# Altium PCB Drozga_v1.2.PcbDoc
Units mm, origin at the board's own origin, x right, y up, seen from the top; angles counter-clockwise.
Board outline 152.4 x 101.6 mm, 2 copper layers (Top Layer, Bottom Layer); 49 components, 36 nets, 183 pads, 19 vias.
Unrouted connection lines stored in the file: 1.
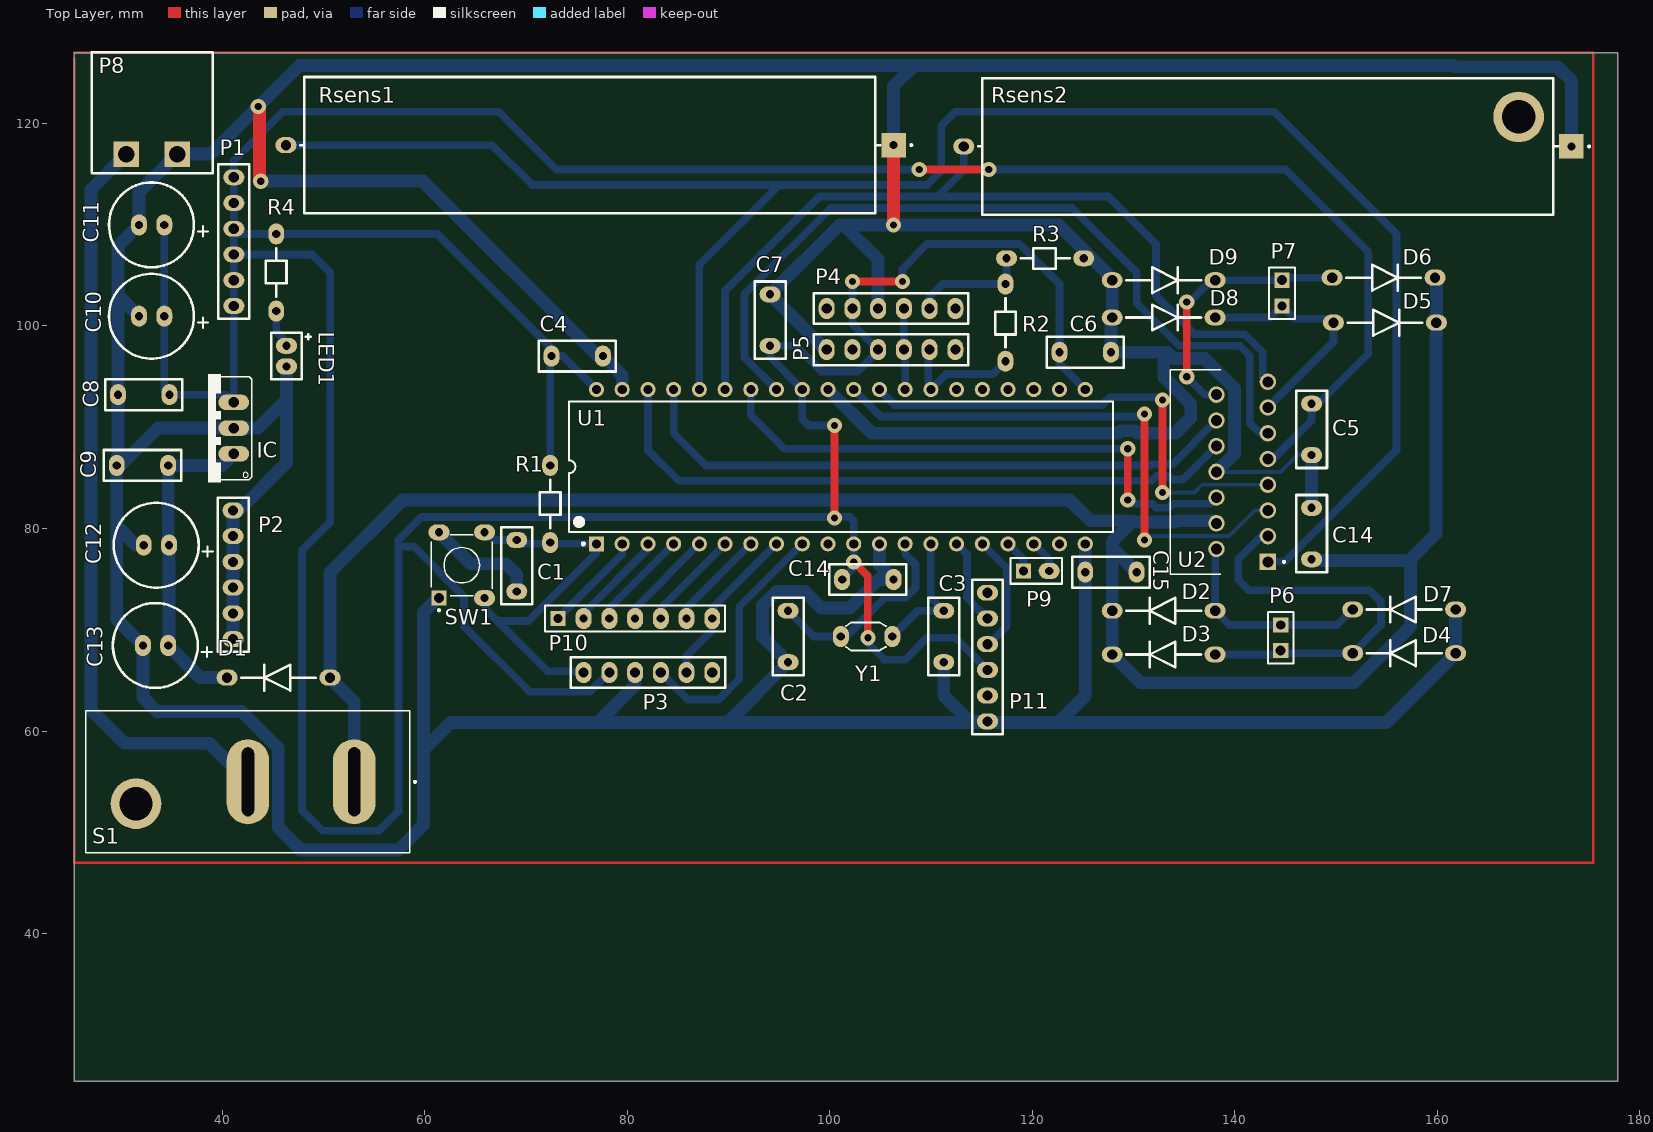
[diagram p0: Top Layer view]
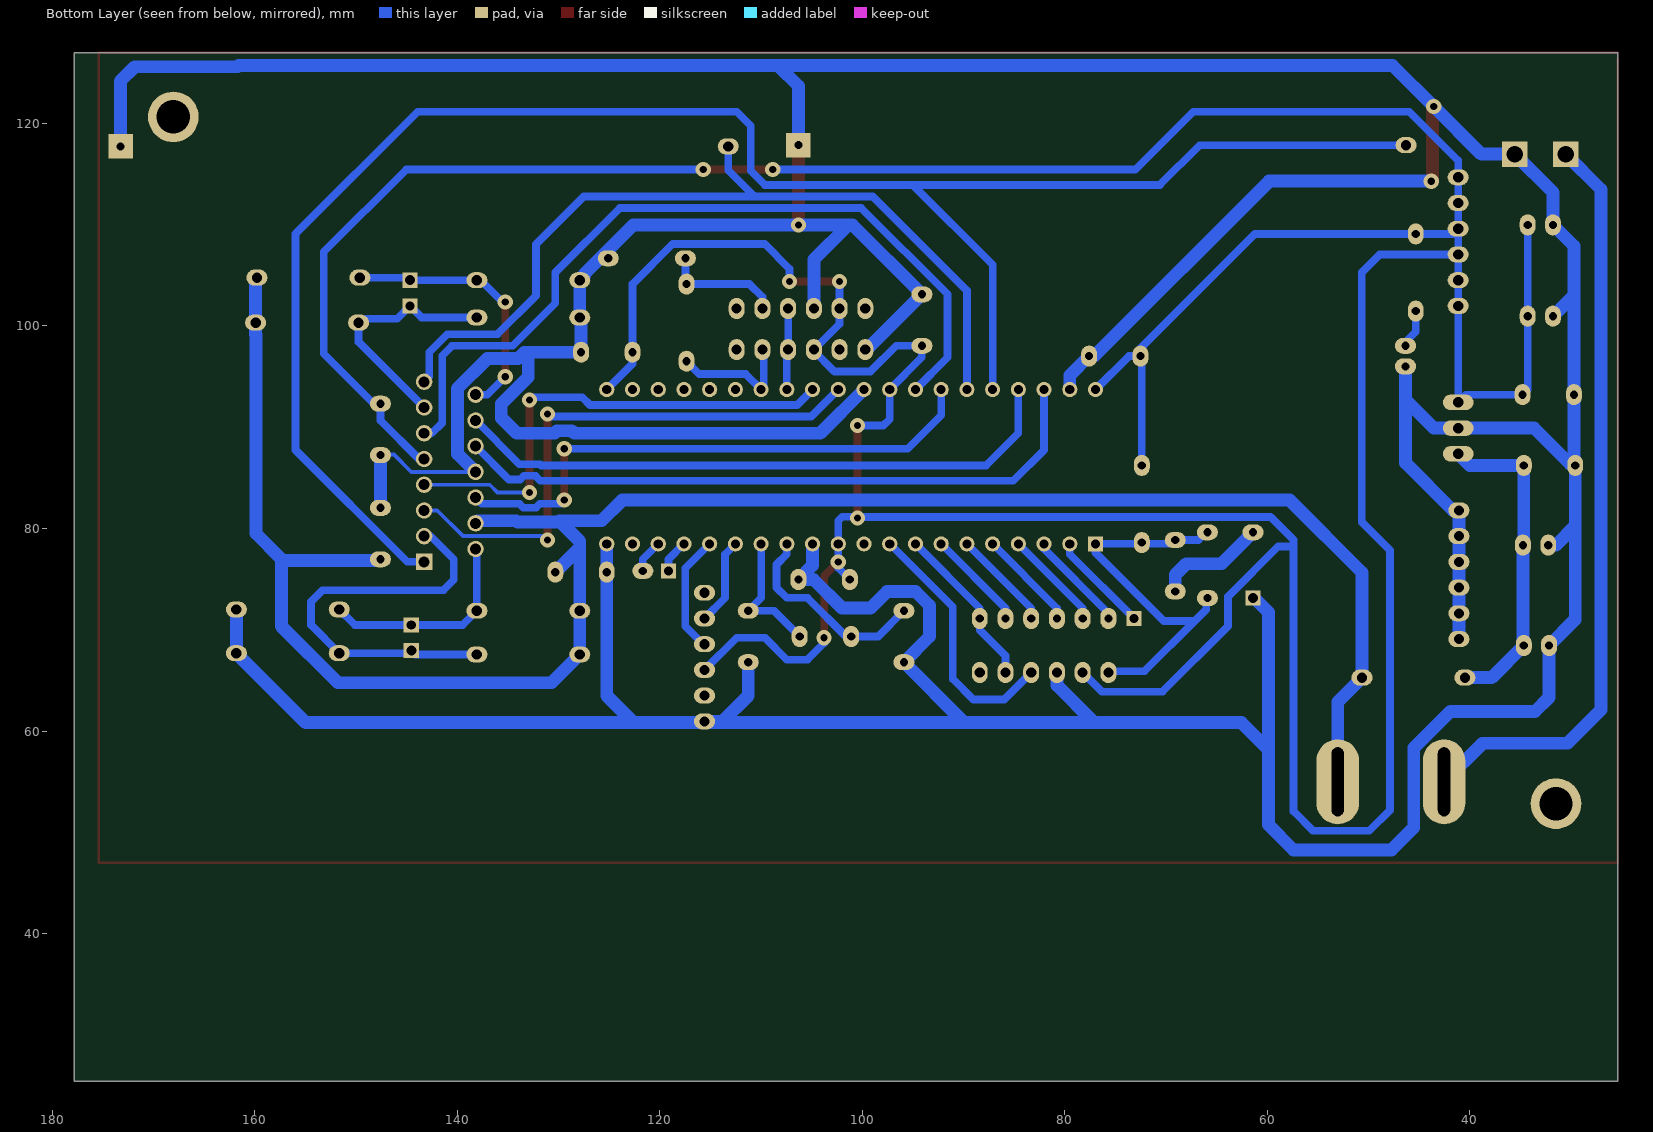
[diagram p1: Bottom Layer view, seen from below]

## Layer stack, top to bottom
Top Solder: solder mask 0.0102, Solder Resist, Dk 3.5
Top Layer: signal copper 0.0356
Dielectric 1: dielectric 0.32, FR-4, Dk 4.8
Bottom Layer: signal copper 0.0356
Bottom Solder: solder mask 0.0102, Solder Resist, Dk 3.5

## Board outline
25.4,25.4 177.8,25.4 177.8,127 25.4,127

## Design rules (kind name [scope] priority, off if disabled: settings)
Clearance [All] p1: gap=0.254 ignorepadtopadclearanceinfootprint=FALSE
PolygonConnect [All] p1: connectstyle=Relief reliefconductorwidth=0.254 reliefentries=4 polygonreliefangle="90 Angle" airgapwidth=0.254
RoutingVias [All] p1: holewidth=0.711 width=1.27 viastyle="Through Hole" minholewidth=0.711 minwidth=1.27 maxholewidth=0.711 maxwidth=1.27
SolderMaskExpansion [All] p1: expansion=0.102
Width Width_1 [InNetClass('Signal')] p1: maxlimit=0.762 minlimit=0.381 preferedwidth=0.762
Width [InNetClass('Power')] p2: maxlimit=1.27 minlimit=0.381 preferedwidth=1.27
30 further rules are at their usual default settings.

## Classes and differential pairs
net class Signal: +5 INT0 INT2 MCLR NetLED1_1 NetP4_5 OSC1 OSC2 OUT1 OUT2 OUT3 OUT4 PGC PGD PWM1 PWM2 RB0 RB1 RB2 RB3 RB4 RB5 RB9 RB10 RB11 RB12 RF0 RF1 U1ARX U1ATX U2RX U2TX
net class Power: GND NetC9_2 NetP8_2 VCC
component class Tenk: C1 C2 C3 C4 C5 C6 C7 C8 C9 C10 C11 C12 C13 C14 C15 D1 D2 D3 D4 D6 D7 D8 D9 IC LED1 P1 P2 P3 P4 P6 P7 P8 P9 P10 P11 R1 R2 R3 R4 Rsens1 Rsens2 S1 SW1 U1 U2 Y1

## Components (designator, comment, footprint, x,y, rotation, side; value= is the part's Value field where it differs from the comment)
C1 "Cap" CAP200#1 69.088,73.787 r90 top value=100nF
C2 "Cap" CAP200#1 95.885,66.802 r90 top value=33pF
C3 "Cap" CAP200#1 111.252,66.802 r90 top value=33pF
C4 "Cap" CAP200#1 77.597,97.028 r180 top value=100nF
C5 "Cap" CAP200#1 147.574,87.249 r90 top value=100nF
C6 "Cap" CAP200#1 127.762,97.409 r180 top value=100nF
C7 "Cap" CAP200#1 94.107,103.124 r270 top value=100nF
C8 "Cap" CAP200#1 29.718,93.218 r0 top value=100nF
C9 "Cap" CAP200#1 29.591,86.233 r0 top value=100nF
C10 "Cap Pol1" RAD4 34.29,100.965 r180 top value=470uF
C11 "Cap Pol1" RAD4 34.29,109.982 r180 top value=470uF
C12 "Cap Pol1" RAD4 34.758,78.359 r180 top value=470uF
C13 "Cap Pol1" RAD4 34.671,68.453 r180 top value=470uF
C14 "Cap" CAP200#1 106.299,74.969 r180 top value=100nF
C14 "Cap" CAP200#2 147.574,76.962 r90 top value=100nF (schematic designator C15)
C15 "Cap" CAP200#1 125.222,75.692 r0 top value=100nF
D1 "Diode 1N4007" DIODE400 45.82,65.278 r0 top
D2 "Diode 1N5402" DIODE400 133.223,71.882 r0 top
D3 "Diode 1N5402" DIODE400 133.223,67.564 r0 top
D4 "Diode 1N5402" DIODE400 156.972,67.691 r0 top
D5 "Diode 1N5402" DIODE400 154.559,100.33 r180 top
D6 "Diode 1N5402" DIODE400 154.432,104.775 r180 top
D7 "Diode 1N5402" DIODE400 156.972,72.009 r0 top
D8 "Diode 1N5402" DIODE400 132.715,100.838 r180 top
D9 "Diode 1N5402" DIODE400 132.715,104.521 r180 top
IC "L7805" 78XXS 38.608,89.916 r90 top
LED1 "GREEN" LED_2 46.736,97.028 r270 top
P1 "5V" HEADER_6 41.148,108.331 r180 top
P2 "GND" HEADER_6 41.081,75.438 r180 top
P3 "Programator" HEADER_6 82.042,65.786 r90 top
P4 "Bluetooth" HEADER_6 106.045,101.727 r90 top
P5 "FT232" HEADER_6 106.045,97.663 r270 top
P6 "Motor 1" HDR1X2#1 144.526,70.485 r270 top
P7 "Motor 2" HDR1X2#1 144.653,101.981 r90 top
P8 "2EDGRC-5.08-02P-14-00A(H)" PWR_Con 32.639,121.031 r90 top
P9 "Interrupt" HDR1X2#2 119.126,75.819 r0 top
P10 "GPIO" HDR1X7 73.152,71.12 r0 top
P11 "FT232" HEADER_6 115.57,67.31 r0 top
R1 "Res1" RES400 72.39,82.423 r90 top value=10K
R2 "Res1" RES400 117.348,100.33 r270 top value=4.7K
R3 "Res1" RES400 121.265,106.68 r180 top value=10K
R4 "Res1" RES400 45.339,105.283 r90 top value=1K
Rsens1 "15W" Rsens 76.299,117.856 r180 top value=5
Rsens2 "15W" Rsens 143.228,117.729 r180 top value=5
S1 "" SW_RB141C1100 42.545,54.991 r0 top
SW1 "TASTER" SW_1825910-6-4 63.663,76.379 r90 top
U1 "DSPIC30F4013-20I/P" PDIP600-P40 101.092,86.106 r90 top
U2 "L298N" TO127P2020X500X2100-15 143.256,76.708 r180 top
Y1 "XTAL" OSC_5 103.251,69.342 r90 top

## Footprints (in the part's own frame and the unit in brackets; to place one, negate y for a bottom-side part, rotate by r counter-clockwise, add the part's x,y. Pads: shape width x height; smd on the part's side, far side on the other; paste and mask are expansions set on the pad)
78XXS [mil]
  oval 60x120 hole 40: GND(0,-100) IN(-100,-100) OUT(100,-100)
  silkscreen extent -210,-170 210,0
CAP200#1 [mil]
  oval 62x82 hole 32: 1(0,0) 2(200,0)
  silkscreen extent -50,-60 250,60
CAP200#2 [mil]
  oval 62x82 hole 32: 14.1(0,0) 14.2(200,0)
  silkscreen extent -50,-60 250,60
DIODE400 [mil]
  oval 82x62 hole 40: 1(190,0) 2(-210,0)
  silkscreen extent -155,-50 135,50
HDR1X2#1 [mm] "Connector; Header; 2 Position"
  rect 1.5x1.5 hole 0.9: 1(0,0)
  rect 1.498x1.498 hole 0.99: 2(2.54,0)
  silkscreen extent -1.27,-1.27 3.81,1.27
HDR1X2#2 [mm] "Connector; Header; 2 Position"
  rect 1.5x1.5 hole 0.9: 1(0,0)
  oval 2.083x1.575 hole 0.813: 2(2.54,0)
  silkscreen extent -1.27,-1.27 3.81,1.27
HDR1X7 [mil] "Connector; Header; 7 Position"
  rect 59.06x59.06 hole 35.43: 1(0,0)
  oval 62x82 hole 32: 2(100,0) 3(200,0) 4(300,0) 5(400,0) 6(500,0) 7(600,0)
  silkscreen extent -50,-50 650,50
HEADER_6 [mil]
  oval 82x62 hole 39.37: 1(0,250) 2(0,150) 3(0,50) 4(0,-50) 5(0,-150) 6(0,-250)
  silkscreen extent -60,-300 60,300
LED_2 [mil]
  oval 62x82 hole 32: 1(40,-15) 2(-40,-15)
  silkscreen extent -90,-75 90,80, body extent -105,-126 110,106, height 346
OSC_5 [mil]
  oval 82x62 hole 32: 1(0,-115) 2(0,85)
  silkscreen extent -55,-90 55,65, body extent -92,-240 92,207, height 138
PDIP600-P40 [mm] "DIP, 40-Leads, Row Spacing 15.24mm, Pitch 2.54mm, Body 51.8x13.5mm"
  rect 1.5x1.5 hole 0.9: 1(-7.62,24.13)
  round 1.5 hole 0.9: 2(-7.62,21.59) 3(-7.62,19.05) 4(-7.62,16.51) 5(-7.62,13.97) 6(-7.62,11.43) 7(-7.62,8.89) 8(-7.62,6.35) 9(-7.62,3.81) 10(-7.62,1.27) 11(-7.62,-1.27) 12(-7.62,-3.81) 13(-7.62,-6.35) 14(-7.62,-8.89) 15(-7.62,-11.43) 16(-7.62,-13.97) 17(-7.62,-16.51) 18(-7.62,-19.05) 19(-7.62,-21.59) 20(-7.62,-24.13) 21(7.62,-24.13) 22(7.62,-21.59) 23(7.62,-19.05) 24(7.62,-16.51) 25(7.62,-13.97) 26(7.62,-11.43) 27(7.62,-8.89) 28(7.62,-6.35) 29(7.62,-3.81) 30(7.62,-1.27) 31(7.62,1.27) 32(7.62,3.81) 33(7.62,6.35) 34(7.62,8.89) 35(7.62,11.43) 36(7.62,13.97) 37(7.62,16.51) 38(7.62,19.05) 39(7.62,21.59) 40(7.62,24.13)
  silkscreen extent -7.74,-26.85 6.45,26.85, body extent -7.3,-26.85 7.3,26.85, height 6.35
PWR_Con [mil]
  rect 100x100 hole 62.99: 1(-160,-115) 2(-160,83)
  silkscreen extent -234,-253 236,217, body extent -239,-256 234,222, height 344
RAD4 [mil]
  oval 62x82 hole 32: 1(0,0) 2(98.43,0)
  silkscreen extent -170,-165 215,165
RES400 [mil]
  oval 82x62 hole 32: 1(-150,0) 2(150,0)
  silkscreen extent -95,-40 95,40
Rsens [mm]
  oval 2.083x1.575 hole 1.016: A(30,0)
  rect 2.43x2.43 / inner round 2.43 / far side rect 2.43x2.43 hole 0.8: C(-30,0)
  silkscreen extent -31.85,-6.73 28.57,6.73
SW_1825910-6-4 [mm]
  rect 1.498x1.498 hole 0.99: 1(-3.25,2.25)
  oval 1.575x2.083 hole 0.813: 2(3.25,2.25) 3(-3.25,-2.25) 4(3.25,-2.25)
  silkscreen extent -4.54,-3 3,3
SW_RB141C1100 [mm]
  oval 4.2x8.4 hole 1.2 slot 6.8 at 90 deg: 1(10.5,0) 2(0,0)
  silkscreen extent -16,-7 16.6,7, body extent -16.35,-7 16.35,7, height 24.57
TO127P2020X500X2100-15 [mm]
  rect 1.62x1.62 hole 1.08: 1(0,0)
  round 1.62 hole 1.08: 2(5.08,-1.27) 3(0,-2.54) 4(5.08,-3.81) 5(0,-5.08) 6(5.08,-6.35) 7(0,-7.62) 8(5.08,-8.89) 9(0,-10.16) 10(5.08,-11.43) 11(0,-12.7) 12(5.08,-13.97) 13(0,-15.24) 14(5.08,-16.51) 15(0,-17.78)
  silkscreen extent -1.69,-18.99 9.63,1.21

## Part data
C1 C2 C3 C4 C5 C6 C7 C8 C9 C14 C14 C15: "Capacitor", LatestRevisionDate=17-Jul-2002, LatestRevisionNote="Re-released for DXP Platform.", PackageDescription="Radial Cap, Thru-Hole; 2 Leads; 0.3 in Pin Spacing", PackageReference=RAD-0.3, Published=8-Jun-2000, Publisher="Altium Limited"
C10 C11 C12 C13: "Polarized Capacitor (Radial)", LatestRevisionDate=17-Jul-2002, LatestRevisionNote="Re-released for DXP Platform.", PackageDescription="Polarized Capacitor (Radial); 2 Leads", PackageReference=RB7.6-15, Published=8-Jun-2000, Publisher="Altium Limited"
D1: "1 Amp General Purpose Rectifier", Code_JEDEC=DO-204-AL, ComponentLink1Description="Manufacturer Link", ComponentLink1URL=http://www.fairchildsemi.com/, ComponentLink2Description=Datasheet, ComponentLink2URL=http://www.fairchildsemi.com/ds/1N%2F1N4001.pdf, DatasheetVersion=1998, LatestRevisionDate=17-Jul-2002, LatestRevisionNote="Re-released for DXP Platform.", PackageDescription="Diode, Axial; Body 5.2 x 2.7 mm (LxDia. max), Lead Dia. 0.86 mm (max)", PackageReference=DO-41, PackageVersion=Aug-1999, Published=8-Jun-2000, Publisher="Altium Limited"
D2 D3 D4 D5 D6 D7 D8 D9: "3 Amp General Purpose Rectifier", ComponentLink1Description="Manufacturer Link", ComponentLink1URL=http://www.fairchildsemi.com/, ComponentLink2Description=Datasheet, ComponentLink2URL=http://www.fairchildsemi.com/ds/1N%2F1N5400.pdf, DatasheetVersion=1998, LatestRevisionDate=17-Jul-2002, LatestRevisionNote="Re-released for DXP Platform.", PackageDescription="Diode, Axial; Body 9.5 x 5.6 mm (LxDia. max), Lead Dia. 1.32 mm (max)", PackageReference=DO-201AD, PackageVersion=Aug-1999, Published=8-Jun-2000, Publisher="Altium Limited"
IC: "Linear Voltage Regulator IC 1 Output 1.5A D2PAK", Package="TO-263-3 Inchange Semiconductor", Availability=Unavailable, MF=STMicroelectronics, MP=L7805, Price=None, SnapEDA_Link=https://www.snapeda.com/parts/L7805/STMicroelectronics/view-part/563125/?ref=snap
LED1: library part LED1, "Typical RED GaAs LED", LatestRevisionDate=08-Jul-2005, LatestRevisionNote="Mech Layer 1 removed.", PackageDescription="LED; 2 Leads", PackageReference=LED-1, Published=8-Jun-2000, Publisher="Altium Limited"
P1 P2 P3 P4 P5 P11: library part "Header 6", "Header, 6-Pin", LatestRevisionDate=17-Jul-2002, LatestRevisionNote="Re-released for DXP Platform.", Publisher="Altium Limited"
P6 P7 P9: library part "Header 2", "Header, 2-Pin", LatestRevisionDate=17-Jul-2002, LatestRevisionNote="Re-released for DXP Platform.", Publisher="Altium Limited"
P8: library part 00000002, "TERM BLOCK HDR 2POS 90DEG 5.08MM", Manufacturer Part Number=2EDGRC-5.08-02P-14-00A(H), Price=0.1304, Suplier=TME, Suplier Product Link=https://www.tme.eu/en/details/2edgrc5.08-2p14/pluggable-terminal-blocks/degson-electronics/2edgrc-508-02p-14-00ah/
P10: library part "Header 7", "Header, 7-Pin", LatestRevisionDate=17-Jul-2002, LatestRevisionNote="Re-released for DXP Platform.", Publisher="Altium Limited"
R1 R2 R3 R4: "Resistor", LatestRevisionDate=17-Jul-2002, LatestRevisionNote="Re-released for DXP Platform.", PackageDescription="Axial Device, Thru-Hole; 2 Leads; 0.3 in Pin Spacing", PackageReference=AXIAL-0.3, Published=8-Jun-2000, Publisher="Altium Limited"
Rsens1 Rsens2: library part Res1, "Resistor", LatestRevisionDate=17-Jul-2002, LatestRevisionNote="Re-released for DXP Platform.", PackageDescription="Axial Device, Thru-Hole; 2 Leads;", Published=8-Jun-2000, Publisher="Altium Limited"
S1: library part RB141C1100, "Rocker Switches 15A 125VAC, OFF-ON, Black Rocker, No Markings", Package=None, Availability="In Stock", Check_prices=https://www.snapeda.com/parts/RB141C1100/ITC/view-part/?ref=eda, MF="e-switch inc", MP=RB141C1100, Price=None, Purchase-URL=https://pricing.snapeda.com/search/part/RB141C1100/?ref=eda, SnapEDA_Link=https://www.snapeda.com/parts/RB141C1100/ITC/view-part/?ref=snap
SW1: library part 1825910-6, "Switch Tactile OFF (ON) SPST Round Button PC Pins 0.05A 24VDC 100000Cycles 1.57N Thru-Hole Loose", Package=None, Availability=Unavailable, MP=1825910-6, Price=None
U1: "High-Performance 16-bit Digital Signal Controller, 48 KB Flash, 2 KB SRAM, 1 KB EEPROM, 40-Pin PDIP, Industrial Temperature", Supplier Part Number 1=DSPIC30F4013-20IP-ND, ComponentLink1Description=Datasheet, ComponentLink1URL=http://ww1.microchip.com/downloads/en/DeviceDoc/70138F.pdf, ComponentLink2Description="Packaging Specification", ComponentLink2URL=http://www.microchip.com/stellent/groups/techpub_sg/documents/packagingspec/en012702.pdf, ComponentLink3Description="Microchip.com Home", ComponentLink3URL=http://www.microchip.com/, DatasheetVersion="revF, Apr-2008", PackageDescription="40-Lead Plastic Dual In-Line (P) - 600 mil Body [PDIP]", PackageReference=PDIP600-P40, PackageVersion="revBB, Aug-2009", Published=29-Jan-2009, Publisher="Altium Limited", Supplier 1=Digi-Key, Supplier 2=Farnell, Supplier Part Number 2=1439755
U2: "Dual Full Bridge Motor Driver 15-Pin(15+Tab) MULTIWATT V Tube", Package=None, Availability=Unavailable, MP=L298N, Price=None
Y1: "Crystal Oscillator", LatestRevisionDate=17-Jul-2002, LatestRevisionNote="Re-released for DXP Platform.", PackageDescription="Crystal, Thru-Hole; 2 Leads; Body 3.1 x 8.2 mm (Dia.xH)", PackageReference=R38, Published=8-Jun-2000, Publisher="Altium Limited"

## Free pads (board coordinates)
  round 5 hole 3.3: MH(31.496,52.832) MH(168.021,120.65)

## Via types
v1: diameter 1.5, hole 0.711, Top Layer to Bottom Layer, tented both sides, 19 vias

## Nets (pads, with @x,y where several pads share a name; then routed paths per layer and width w, separated by ;. In a path a pad name is that pad's centre, name@x,y a point inside that pad or via, vN(x,y) a via of type N, cw(c..) or ccw(c..) an arc to the next point about the centre after c; other vN are vias at no path point)
+5: C4.2 C5.2 C6.2 C7.2 C8.2 C10.1 C11.1 C14.2 IC.OUT P1.1 P1.2 P1.3 P1.4 P1.5 P1.6 P3.2 P4.2 P5.4 P11.4 R1.2 R4.2 U1.11 U1.21 U1.32 U1.40 U2.9 | length 531.8
  Top Layer w0.762: v1(100.457,81.026) v1(100.457,90.17) ; v1(102.235,104.394) v1(107.188,104.394) ; v1(102.362,76.708) 103.759,75.311 v1(103.759,69.215) ; v1(108.839,115.443) v1(115.697,115.443)
  Bottom Layer w0.762: C11.1@34.671,109.601 C11.1 C10.1 34.29,93.726 C8.2 40.386,93.218 IC.OUT P1.1 P1.2 P1.3 ; R1.2 72.39,96.901 C4.2 ; U1.40 73.66,97.028 C4.2 ; P3.2 76.327,63.881 70.358,63.881 63.881,70.358 63.881,73.279 58.928,78.232 57.658,78.232 57.404,77.978 ; v1(100.457,90.17) 97.917,90.17 97.282,90.805 U1.32 94.107,96.901 C7.2 96.647,98.044 99.187,95.504 102.743,95.504 104.838,97.599 P5.4 102.235,100.203 P4.2 v1(102.235,104.394) ; C14.2 102.362,76.112 v1(102.362,76.708) U1.11 102.362,80.772 101.981,81.153 100.457,81.153 v1(100.457,81.026) 100.343,81.14 59.677,81.14 57.404,78.867 57.404,77.978 ; v1(103.759,69.215) 103.759,68.707 105.41,67.056 107.442,67.056 109.601,69.215 112.395,69.215 P11.4 ; v1(107.188,104.394) 107.188,105.664 109.627,108.103 118.719,108.103 122.682,104.14 C6.2 122.682,96.266 U1.21 ; v1(108.839,115.443) 73.025,115.443 67.31,121.158 45.974,121.158 41.148,116.332 P1.6 P1.5 P1.4 ; v1(115.697,115.443) 145.034,115.443 153.162,107.315 153.162,97.27 148.221,92.329 C5.2 147.574,90.678 143.764,86.868 U2.9 ; P1.3 48.895,107.061 50.673,105.283 50.673,80.645 47.879,77.851 47.879,52.197 49.92,50.156 55.49,50.156 57.404,52.07 57.404,77.978 ; P1.3 P1.4 ; P1.4 41.656,109.093 R4.2 61.214,109.093 72.517,97.79 C4.2
GND: C1.1 C2.1 C3.1 C4.1 C5.1 C6.1 C7.1 C8.1 C9.1 C10.2 C11.2 C12.2 C13.2 C14.1 C14.14.2 C15.1 D4.1 D7.1 D8.1 D9.1 IC.GND LED1.1 P2.1 P2.2 P2.3 P2.4 P2.5 P2.6 P3.3 P4.3 P5.6 P8.1 P11.6 R3.1 Rsens1.C Rsens2.C SW1.1 SW1.2 U1.12 U1.20 U1.31 U1.39 U2.8 | length 730.7
  Top Layer w1.27: v1(43.561,121.666) 43.687,121.54 43.687,114.428 v1(43.815,114.3) ; v1(106.299,109.982) Rsens1.C
  Bottom Layer w0.381: U2.8 144.526,85.598 146.24,87.312 147.511,87.312 C5.1
  Bottom Layer w1.27: C10.2 29.718,103.037 ; C12.2 31.496,78.359 29.591,80.264 ; P2.1 P2.2 P2.3 P2.4 P2.5 P2.6 41.656,81.788 46.355,86.487 46.355,92.71 ; v1(43.815,114.3) 59.817,114.3 77.089,97.028 C4.1 79.502,95.123 U1.39 ; LED1.1@46.736,96.012 46.355,95.631 46.355,92.71 ; SW1.1@61.413,73.256 59.889,71.732 59.889,58.166 ; SW1.2 64.524,76.517 68.008,76.517 69.088,75.438 C1.1 C1.1@69.342,73.787 ; P3.3 80.772,64.516 77.089,60.833 ; P5.6@99.568,97.663 C7.1 100.965,109.982 101.346,109.982 ; U1.31 104.14,89.408 128.439,89.408 128.682,89.65 130.144,89.65 130.387,89.408 134.112,89.408 135.636,90.932 135.636,92.297 132.969,94.964 132.969,97.409 ; P4.3 104.775,106.553 101.346,109.982 ; U1.12 104.902,76.366 C14.1 104.814,74.969 101.981,72.136 99.187,72.136 97.536,73.787 94.742,73.787 93.345,72.39 93.345,69.342 C2.1 89.916,60.833 ; Rsens1.C 106.299,123.698 108.331,125.73 ; C3.1 111.252,63.5 113.792,60.96 P11.6 ; R3.1 125.095,106.68 125.4,106.985 R3.1@125.451,106.985 ; U1.20 C15.1 125.222,63.5 122.555,60.833 ; U2.8 139.954,87.376 139.954,93.843 137.023,96.774 133.967,96.774 133.332,97.409 132.969,97.409 ; C14.14.2 C5.1 ; D7.1 D4.1 154.94,60.833 122.555,60.833 ; Rsens2.C 173.228,124.206 171.831,125.603 161.699,125.603 161.572,125.73 108.331,125.73 ; 29.591,80.264 29.591,71.033 C13.2 32.171,63.333 33.568,61.936 41.927,61.936 45.534,58.329 45.534,50.478 47.752,48.26 57.404,48.26 59.889,50.745 59.889,58.166 ; 29.591,80.264 C9.1 C9.1@29.718,86.36 ; C9.1@29.718,86.36 C8.1 29.718,103.037 ; C9.1@29.718,86.36 30.099,86.36 33.655,89.916 IC.GND 43.561,89.916 46.355,92.71 ; 29.718,103.037 29.718,107.91 C11.2 31.79,113.197 P8.1 38.862,116.967 v1(43.561,121.666) 47.625,125.73 108.331,125.73 ; 59.889,58.166 62.556,60.833 77.089,60.833 ; 77.089,60.833 89.916,60.833 ; 89.916,60.833 122.555,60.833 ; 101.346,109.982 v1(106.299,109.982) 122.606,109.982 127.432,105.156 127.432,104.978 D9.1 D8.1 127.762,100.711 C6.1 132.969,97.409
INT0: P9.1 U1.17 | length 3.3
  Bottom Layer w0.762: U1.17 119.126,76.962 P9.1
INT2: P9.2 U1.18 | length 3.3
  Bottom Layer w0.762: U1.18 121.666,76.962 P9.2
MCLR: C1.2 P3.1 R1.1 SW1.3 SW1.4 U1.1 | length 37.9
  Bottom Layer w0.762: SW1.3@65.913,73.256 66.04,73.129 66.04,72.009 67.183,70.866 ; SW1.4@65.913,79.756 66.802,78.867 C1.2 69.342,78.867 69.723,78.486 U1.1 76.962,77.597 70.231,70.866 67.183,70.866 ; P3.1@75.057,65.913 72.136,65.913 67.183,70.866
NetC9_2: C9.2 C12.1 C13.1 D1.2 IC.IN | length 31.9
  Bottom Layer w1.27: D1.2 37.846,65.278 C13.1 34.758,68.54 C12.1 34.758,78.486 34.671,78.573 C9.2 40.005,86.233 IC.IN
NetLED1_1: LED1.2 R4.1 | length 4
  Bottom Layer w0.762: R4.1 45.339,99.441 LED1.2@46.736,98.044
NetP4_5: P4.5 R2.1 R3.2 | length 11.7
  Bottom Layer w0.762: P4.5 109.855,102.87 111.125,104.14 R2.1 117.455,104.247 R3.2
NetP8_2: P8.2 S1.2 | length 74.7
  Bottom Layer w1.27: P8.2 27.051,113.487 27.051,62.103 30.353,58.801 38.735,58.801 S1.2
OSC1: C2.2 U1.13 Y1.2 | length 20.4
  Bottom Layer w0.762: C2.2 98.425,69.342 Y1.2 101.6,69.342 105.41,73.152 107.442,73.152 108.458,74.168 108.458,76.454 107.442,77.47 U1.13
OSC2: C3.2 U1.14 Y1.1 | length 13.4
  Bottom Layer w0.762: Y1.1@106.045,69.469 Y1.1 108.712,71.882 C3.2 109.982,73.152 U1.14
OUT1: D2.1 D7.2 P6.1 U2.2 | length 20.9
  Bottom Layer w0.762: U2.2 138.049,77.851 D2.1 139.446,70.485 P6.1 150.114,70.485 D7.2
OUT2: D3.1 D4.2 P6.2 U2.3 | length 41
  Bottom Layer w0.762: D3.1 144.145,67.564 P6.2 144.78,67.691 D4.2 154.432,70.485 154.432,72.771 153.289,73.914 141.351,73.914 140.335,74.93 140.335,76.962 142.621,79.248 U2.3
OUT3: D5.1 D8.2 P7.1 U2.13 | length 23.9
  Bottom Layer w0.762: D8.2 143.51,100.838 P7.1 145.923,100.711 148.971,100.711 149.352,100.33 D5.1 149.733,98.425 U2.13
OUT4: D6.1 D9.2 P7.2 U2.14 | length 26.4
  Top Layer w0.762: v1(135.255,94.996) v1(135.255,102.362)
  Bottom Layer w0.762: v1(135.255,94.996) 137.033,93.218 U2.14 ; v1(135.255,102.362) 135.509,102.362 137.668,104.521 D9.2 138.367,104.839 138.684,104.521 P7.2 144.907,104.521 145.161,104.775 D6.1@149.352,104.775
PGC: P3.5 P10.7 U1.8 | length 16.4
  Bottom Layer w0.762: P3.5 85.852,67.437 88.392,69.977 P10.7 88.392,72.136 U1.8
PGD: P3.4 U1.9 | length 25.6
  Bottom Layer w0.762: P3.4 85.979,63.119 89.027,63.119 91.059,65.151 91.059,72.263 U1.9
PWM1: U1.34 U2.6 | length 55.7
  Top Layer w0.762: v1(129.413,82.804) v1(129.413,87.884)
  Bottom Layer w0.762: U1.34 92.202,91.186 95.504,87.884 v1(129.413,87.884) ; v1(129.413,82.804) 129.782,82.435 131.835,82.435 132.216,82.054 133.468,82.054 133.849,82.435 137.553,82.435 U2.6
PWM2: U1.33 U2.11 | length 80.9
  Bottom Layer w0.762: U1.33 91.567,96.901 91.567,103.124 100.088,111.645 123.94,111.645 130.302,105.283 130.302,102.235 134.493,98.044 140.497,98.044 141.478,97.063 141.478,90.424 142.494,89.408 U2.11 U2.11@143.383,89.408
RB0: P10.1 U1.2 | length 10
  Bottom Layer w0.762: P10.1 79.502,77.47 U1.2
RB1: P10.2 U1.3 | length 10
  Bottom Layer w0.762: P10.2 75.692,71.628 82.042,77.978 U1.3
RB2: P10.3 U1.4 | length 10
  Bottom Layer w0.762: P10.3 78.232,72.136 U1.4
RB3: P10.4 U1.5 | length 10
  Bottom Layer w0.762: P10.4 80.772,72.136 U1.5
RB4: P10.5 U1.6 | length 10
  Bottom Layer w0.762: P10.5 83.312,72.136 U1.6
RB5: P10.6 U1.7 | length 10
  Bottom Layer w0.762: P10.6 85.852,72.136 U1.7
RB9: U1.38 U2.10 | length 65.1
  Bottom Layer w0.762: U1.38 82.042,87.757 85.09,84.709 131.772,84.709 132.268,85.205 133.416,85.205 133.785,84.836 134.874,84.836 U2.10
RB10: U1.37 U2.12 | length 61.1
  Bottom Layer w0.762: U1.37 84.582,89.408 87.757,86.233 131.68,86.233 131.795,86.348 133.846,86.348 U2.12
RB11: Rsens1.A U1.36 U2.1 | length 183.9
  Bottom Layer w0.762: Rsens1.A 66.675,117.856 70.6,113.931 109.613,113.931 110.998,115.316 110.998,119.761 112.395,121.158 143.891,121.158 155.956,109.093 155.956,87.757 144.907,76.708 U2.1 ; U1.36 87.122,106.045 94.996,113.919
RB12: Rsens2.A U1.35 U2.15 | length 85.2
  Bottom Layer w0.762: U1.35@89.789,93.853 U1.35 89.662,103.505 98.945,112.788 127.496,112.788 132.207,108.077 132.207,102.997 136.017,99.187 140.97,99.187 142.748,97.409 142.748,94.996 U2.15 ; 110.744,112.903 113.228,115.387 Rsens2.A
RF0: U1.30 U2.5 | length 56.2
  Top Layer w0.762: v1(131.064,78.867) v1(131.064,91.313)
  Bottom Layer w0.381: v1(131.064,78.867) 131.064,78.994 131.333,79.263 139.431,79.263 141.955,81.788 U2.5
  Bottom Layer w0.762: U1.30 105.029,91.059 130.81,91.059 v1(131.064,91.313) ; U2.5@143.002,81.534 U2.5
RF1: U1.29 U2.7 | length 48.9
  Top Layer w0.762: v1(132.842,83.566) 132.854,83.578 v1(132.854,92.698)
  Bottom Layer w0.381: v1(132.842,83.566) 136.017,83.566 136.779,84.328 U2.7
  Bottom Layer w0.762: U1.29 106.426,92.202 126.873,92.202 127.635,92.964 132.588,92.964 v1(132.854,92.698)
U1ARX: P11.3 U1.16 | length 11.8
  Bottom Layer w0.762: U1.16 117.475,76.073 117.475,70.358 115.697,68.58 P11.3
U1ATX: P11.2 U1.15 | length 8.6
  Bottom Layer w0.762: U1.15 113.538,77.47 113.538,73.152 P11.2
U2RX: P4.4 P5.3 U1.28 | length 8.2
  Bottom Layer w0.762: U1.28 107.442,97.536 P5.3 P4.4 P4.4@107.442,101.854
U2TX: P5.2 R2.2 U1.27 | length 13.1
  Bottom Layer w0.762: P5.2@109.728,98.171 109.728,93.98 U1.27 111.506,95.25 116.078,95.25 R2.2
VCC: C14.14.1 C15.2 D1.1 D2.2 D3.2 D5.2 D6.2 S1.1 U2.4 | length 209
  Bottom Layer w1.27: S1.1 53.045,62.879 D1.1 50.646,75.665 57.785,82.804 123.698,82.804 125.73,80.772 129.921,80.772 ; C15.2 127.889,78.105 ; U2.4 137.922,80.772 134.162,80.772 134.047,80.657 130.036,80.657 129.921,80.772 ; C14.14.1@147.574,76.835 157.201,76.835 157.353,76.987 ; D6.2@159.893,104.902 D5.2 159.893,99.187 159.868,99.162 159.868,79.502 157.353,76.987 ; 127.889,78.105 D2.2 D3.2 130.683,64.77 151.765,64.77 157.353,70.358 157.353,76.987 ; 127.889,78.105 127.889,78.74 129.921,80.772
pads on no net: P3.6 P4.1 P4.6 P5.1 P5.5 P11.1 P11.5 U1.10 U1.19 U1.22 U1.23 U1.24 U1.25 U1.26
copper on no net: | length 459.4
  Top Layer w0.254: 25.4,126.365 25.4,46.99 175.387,46.99 175.387,127 25.4,127

## Text inside footprints (layer, text, board x,y; h text height)
IC: Mechanical 13 "O" at 42.421,91.822 h1.27 r90; Mechanical 13 "I" at 42.423,86.737 h1.27 r90; Mechanical 13 "-" at 42.42,89.281 h1.27 r90